# Altium PCB PCB_HOPE.PcbDoc (part 2 of 2)
Units mm, origin at the board's own origin, x right, y up, seen from the top; angles counter-clockwise.
Board outline 70 x 50 mm, 4 copper layers (Top Layer, Layer 1, Layer 2, Bottom Layer), stack 1.572 mm thick; 98 components, 78 nets, 374 pads, 167 vias.
Unrouted connection lines stored in the file: 2.
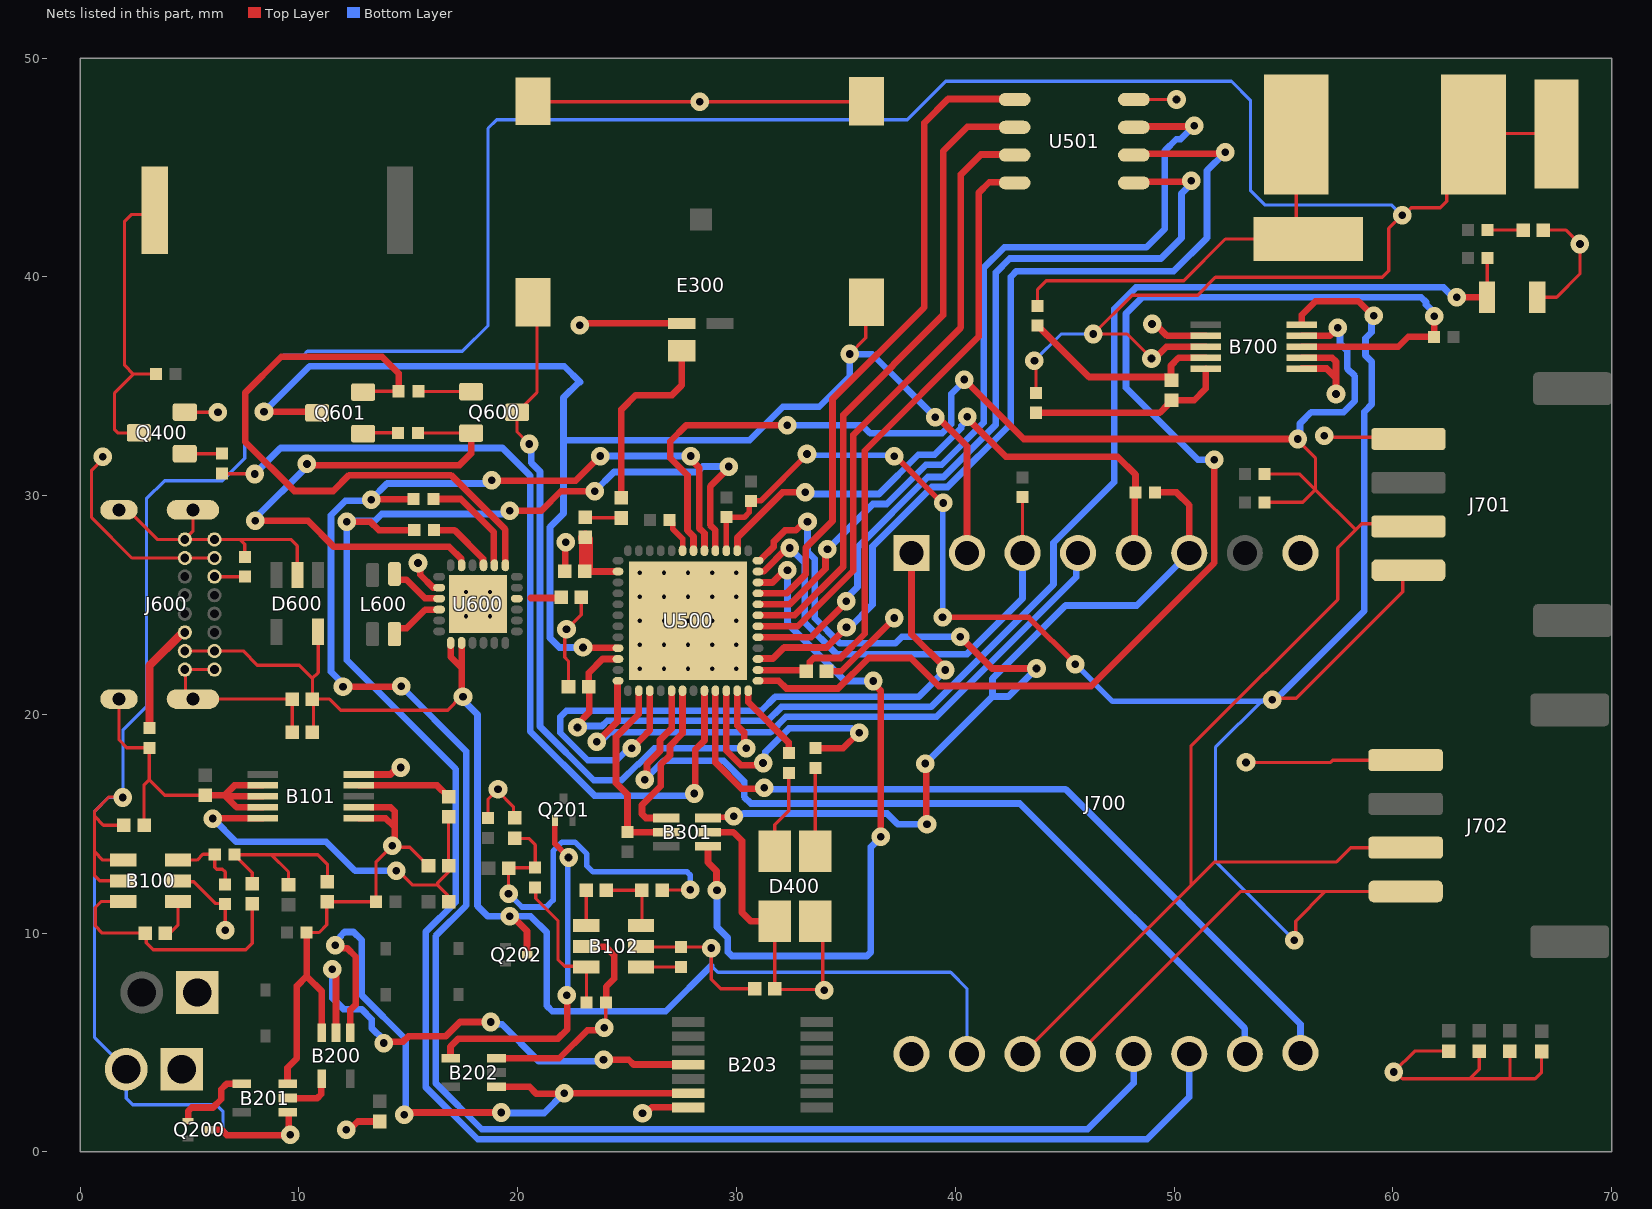
[diagram p4: the nets of this part, all layers, seen from the top]

## Via types
v1: diameter 0.85, hole 0.35, Top Layer to Bottom Layer, 138 vias
v2: diameter 0.5, hole 0.2, Top Layer to Bottom Layer, 29 vias

## Nets (pads, with @x,y where several pads share a name; then routed paths per layer and width w, separated by ;. In a path a pad name is that pad's centre, name@x,y a point inside that pad or via, vN(x,y) a via of type N, cw(c..) or ccw(c..) an arc to the next point about the centre after c; other vN are vias at no path point) (continued)
GND: B100.2 B101.2 B101.3 B101.4 B101.6 B101.7 B101.10 B102.2 B200.3 B201.3 B202.3 B203.7 B300.2 B301.2 B700.1 B700.2 B700.7 C100.2 C101.2 C102.2 C106.2 C107.2 C110.2 C111.2 C302.1 C303.2 C304.2 C400.2 C500.2 C501.2 C502.2 C600.2 C601.2 C602.2 C701.2 D400.2 D400.4 D600.2 E300.2 J100.1 J101.1 J600.A1 J600.A12 J600.B1 J600.B12 J600.S1 J600.S2 J600.S3 J600.S4 J700.8 J700.16 J701.4 J702.4 Q400.2 R101.1 R102.1 R103.1 R106.1 R107.1 R600.1 R601.1 SW400.1 SW401.2 U500.49 U501.4 U600.2 U600.25 | length 173.6
  Top Layer w0.15: J600.S2@1.778,20.701 1.778,18.84 2.138,18.48 R601.1@3.168,18.48 ; J600.S1@1.778,29.351 2.178,29.351 3.528,28.001 J600.B12@4.788,28.001 ; C101.2@2.924,14.935 2.924,16.787 3.154,17.017 ; R601.1@3.175,18.473 3.154,18.452 3.154,17.017 ; B100.2@4.476,12.395 4.522,12.349 5.202,12.349 6.195,11.357 6.608,11.357 R101.1@6.629,11.336 ; Q400.2@4.784,33.818 v1@6.299,33.818 ; J600.S3@5.158,29.351 5.158,28.371 J600.B12@4.788,28.001 ; C100.2@5.715,16.304 3.867,16.304 3.154,17.017 ; J600.A12@6.138,22.051 J600.B1@4.788,22.051 4.815,22.024 4.815,20.882 4.996,20.701 J600.S4@5.158,20.701 C601.2@9.7,20.701 C600.2@9.7,19.177 ; v1(6.629,10.135) R101.1@6.629,11.328 ; R600.1@7.544,27.196 7.523,27.217 7.523,27.778 7.3,28.001 ; D600.2@9.931,26.37 9.931,27.703 9.634,28.001 7.3,28.001 ; R103.1@10.356,10.033 10.922,10.033 11.278,10.389 C106.2@11.278,11.405 ; C106.2@11.307,11.434 R102.1@13.516,11.434 ; R102.1@13.52,11.438 13.52,13.241 v1(14.275,13.995) 14.34,13.93 15.074,13.93 C102.2@15.923,13.081 ; R107.1@18.644,15.258 18.644,16.129 v1(19.101,16.586) 19.101,16.494 19.807,15.788 19.807,15.324 C111.2@19.863,15.268 ; SW401.2@20.701,48.029 20.724,48.006 v1(28.321,48.006) 35.918,48.006 SW400.1@35.941,48.029 ; v1(22.234,23.901) 22.234,23.809 22.158,23.733 22.158,22.607 22.324,22.442 22.324,21.316 22.352,21.288 C303.2@22.352,21.232 ; v1@22.264,23.901 22.264,23.912 22.904,24.552 22.904,25.34 C602.2@22.914,25.349 ; v1(23.952,5.671) 23.952,5.764 24.026,5.837 24.026,6.812 R106.1@24.047,6.833 ; D400.4@31.753,10.538 31.753,7.486 31.809,7.43 33.972,7.43 v1(34.011,7.391) ; D400.2@33.744,10.397 33.945,10.196 33.945,7.478 v1@33.934,7.468 ; U501.4@48.166,48.108 v1(50.114,48.108) ; v1(53.289,17.805) 57.157,17.805 57.26,17.908 J702.4@60.492,17.908 ; J700.8@55.766,27.368 J700.8@55.778,27.381 ; v1(56.871,32.731) 56.936,32.666 60.641,32.666 J701.4@60.716,32.591 ; C304.2@62.56,4.614 61.002,4.614 v1(60.046,3.658) 60.138,3.658 60.443,3.353 63.525,3.353 ; C500.2@63.957,4.614 63.957,3.785 63.525,3.353 ; C501.2@65.354,4.614 65.354,3.353 ; B300.2@66.606,39.065 67.488,39.065 68.555,40.132 v1(68.555,41.504) 67.92,42.139 C400.2@66.881,42.139 ; C701.2@66.802,4.595 66.802,3.65 66.504,3.353 65.354,3.353 ; J600.B12@4.788,28.001 J600.A1@6.138,28.001 7.3,28.001 ; 63.525,3.353 65.354,3.353
  Top Layer w0.305: C100.2@5.715,16.304 6.607,16.304 ; B101.4@8.341,15.756 7.155,15.756 6.655,16.256 ; B101.3@8.341,16.256 6.655,16.256 ; B101.2@8.341,16.756 7.059,16.756 6.607,16.304 ; 9.474,3.852 9.906,4.283 9.906,7.584 10.356,8.034 ; B201.3@9.483,3.114 9.483,3.852 ; R103.1@10.356,10.033 10.356,8.034 ; B200.3@11.049,5.453 11.049,7.341 10.356,8.034 ; C106.2@11.278,11.405 C106.2@11.303,11.43 ; v1(12.167,1.016) 12.314,1.016 12.692,1.394 C110.2@13.691,1.394 ; B101.6@12.741,15.256 13.964,15.256 14.38,14.84 ; B101.10@12.741,17.256 14.187,17.256 14.508,17.577 v1(14.656,17.577) ; B101.7@13.289,15.754 14.201,15.754 14.38,15.575 14.38,14.84 ; v1(14.275,13.995) 14.379,14.1 14.379,14.84 ; v1(15.443,26.924) 15.548,26.82 15.548,26.383 16.128,25.803 16.403,25.803 U600.2@16.411,25.794 ; B202.3@19.033,4.282 21.902,4.282 23.186,5.567 23.848,5.567 v1(23.952,5.671) ; C302.1@22.146,26.543 22.174,26.571 22.174,27.835 v1(22.203,27.864) ; v1(22.835,37.795) 22.913,37.874 E300.2@27.497,37.874 ; B102.2@23.134,9.398 23.144,9.388 24.013,9.388 24.409,8.992 24.409,7.921 24.047,7.558 R106.1@24.047,6.833 ; v1(25.705,1.765) 25.852,1.765 26.126,2.038 B203.7@27.796,2.038 ; B301.2@28.697,14.62 28.703,14.614 29.861,14.614 30.251,14.224 30.251,10.947 30.658,10.541 D400.4@31.75,10.541 D400.4@31.753,10.538 ; C107.2@31.753,7.468 C107.2@31.791,7.43 ; D400.2@33.6,10.541 D400.2@33.744,10.397 ; C502.2@34.115,21.971 34.793,21.971 37.211,24.389 v1(37.211,24.409) ; v1(48.997,37.846) 49.144,37.846 49.686,37.305 B700.7@51.445,37.305 ; B700.1@55.845,35.814 56.976,35.814 57.404,35.386 ; B700.2@55.845,36.305 57.222,36.305 57.4,36.126 ; v1(57.404,34.646) 57.404,35.386 ; 57.404,36.126 57.404,35.386 ; 6.607,16.304 6.655,16.256
  Top Layer w0.381: R102.1@13.516,11.434 R102.1@13.52,11.438
  other v1: 6.299,33.807
  other v2: 25.588,22.082 26.688,22.082 27.788,22.082 28.888,22.082 29.988,22.082 25.588,23.182 26.688,23.182 27.788,23.182 28.888,23.182 29.988,23.182 25.588,24.282 26.688,24.282 27.788,24.282 28.888,24.282 29.988,24.282 17.636,24.494 18.736,24.494 25.588,25.382 26.688,25.382 27.788,25.382 28.888,25.382 29.988,25.382 17.636,25.594 18.736,25.594 25.588,26.482 26.688,26.482 27.788,26.482 28.888,26.482 29.988,26.482
HT: B100.4 B100.5 B201.1 B700.8 C101.1 J100.2 P700.1 Q200.3 R700.2 X700.2 | length 166.8
  Top Layer w0.15: v1@1.93,16.231 1.321,16.231 0.66,15.57 0.66,15.342 ; B100.5@1.976,12.395 0.889,12.395 0.66,12.624 0.66,13.716 ; B100.4@1.976,13.345 1.031,13.345 0.66,13.716 ; C101.1@2.004,14.935 1.067,14.935 0.66,15.342 ; 6.477,1.016 6.502,0.991 ; v1@43.644,36.193 43.644,36.054 43.688,36.01 R700.2@43.688,34.689 ; v1@43.723,36.144 v1@43.723,36.171 ; v1(48.971,36.271) 47.854,37.389 v1(46.304,37.389) 48.082,39.167 51.079,39.167 51.892,39.98 59.519,39.98 59.817,40.277 59.817,42.215 v1(60.427,42.824) 60.519,42.824 60.849,43.155 62.171,43.155 62.468,43.452 62.468,45.286 63.74,46.558 P700.1@67.488,46.558 ; 0.66,13.716 0.66,15.342
  Top Layer w0.305: Q200.3@5.936,1.016 6.477,1.016 ; 6.502,0.991 6.592,0.879 6.706,0.765 6.83,0.765 9.578,0.765 v1(9.601,0.787) 9.542,0.847 9.542,1.766 9.494,1.814 B201.1@9.483,1.814 ; v1(48.971,36.271) 49.119,36.271 49.652,36.805 B700.8@51.445,36.805
  Bottom Layer w0.15: v1(9.601,0.787) 9.576,0.762 6.825,0.762 6.528,1.06 6.528,1.861 6.23,2.159 2.406,2.159 2.108,2.457 J100.2@2.108,3.785 0.66,5.232 0.66,15.57 1.294,16.204 1.955,16.204 v1(1.956,16.205) 1.956,19.271 3.032,20.347 3.032,29.854 3.861,30.683 6.498,30.683 7.529,31.714 7.529,34.656 9.296,36.424 10.211,36.424 10.389,36.601 17.475,36.601 18.644,37.77 18.644,46.787 19.034,47.177 37.804,47.177 39.564,48.937 52.629,48.937 53.492,48.073 53.492,43.96 54.171,43.282 59.958,43.282 60.415,42.824 v1(60.427,42.824) ; v1(43.621,36.17) 44.84,37.389 v1(46.304,37.389)
NetB1_3: B700.3 R703.1 U500.25 | length 60
  Top Layer w0.305: U500.25@30.988,21.532 31.935,21.532 32.283,21.184 34.649,21.184 36.046,22.581 37.97,22.581 39.247,21.304 46.215,21.304 51.841,26.93 v1(51.841,31.648) ; B700.3@55.845,36.805 60.249,36.805 60.706,37.262 R703.1@61.882,37.262 61.891,37.271 61.891,38.192 v1(61.9,38.202)
  Bottom Layer w0.305: v1(51.841,31.648) 51.085,31.648 47.803,34.931 47.803,38.329 48.539,39.065 61.3,39.065 61.516,38.85 61.516,38.733 61.9,38.349 v1(61.9,38.202)
NetB1_4: B700.4 J700.14 J701.2 J702.2 R702.2 R706.2 U500.42 | length 100.5
  Top Layer w0.15: J700.14@43.078,4.481 50.775,12.177 ; R706.2@54.146,29.693 55.88,29.693 56.464,30.277 ; R702.2@54.146,30.988 55.753,30.988 56.464,30.277 ; v1(55.651,32.588) 55.651,32.535 56.464,31.722 56.464,30.277 ; J702.2@60.589,13.91 58.08,13.91 57.429,13.259 51.856,13.259 50.775,12.177 ; J701.2@60.716,28.591 60.595,28.712 58.58,28.712 58.304,28.437 ; 50.775,12.177 50.775,18.546 57.48,25.252 57.48,27.612 58.304,28.437 ; 56.464,30.277 58.304,28.437
  Top Layer w0.305: U500.42@28.038,27.482 28.038,28.137 27.762,28.412 27.762,30.934 26.975,31.721 26.975,32.486 27.712,33.223 32.309,33.223 v1(32.315,33.217) ; v1(40.411,35.306) 43.129,32.588 v1(55.651,32.588) ; B700.4@55.845,37.305 57.121,37.305 v1(57.485,37.668)
  Bottom Layer w0.305: v1(32.315,33.217) 35.745,33.217 36.11,32.851 39.392,32.851 39.818,33.278 39.818,34.652 40.411,35.245 v1(40.411,35.306) ; v1(55.651,32.588) 55.756,32.693 55.756,33.302 56.268,33.814 57.745,33.814 58.268,34.337 58.268,35.462 57.912,35.818 57.912,36.634 57.589,36.956 57.589,37.564 v1(57.485,37.668)
NetB1_5: B700.5 J700.13 J701.1 J702.1 R701.2 R707.2 U500.39 | length 103.3
  Top Layer w0.15: J700.13@45.618,4.481 53.047,11.91 56.92,11.91 ; v1(54.483,20.676) 54.548,20.741 55.59,20.741 60.45,25.601 60.45,26.345 60.47,26.345 J701.1@60.716,26.591 ; v1(55.499,9.677) 55.564,9.743 55.564,10.555 56.92,11.91 ; J702.1@60.589,11.91 56.92,11.91
  Top Layer w0.254: U500.39@29.538,27.482 U500.39@29.538,27.482 29.539,29.013 R707.2@29.54,29.014 30.36,29.014 30.59,29.243 30.59,29.682 R701.2@30.658,29.751 30.675,29.768 31.116,29.768 33.223,31.875 v1(33.223,31.902) ; v1(37.211,31.801) 37.262,31.801 39.395,29.667 v1(39.446,29.667) ; v1(39.421,24.435) 43.358,24.435 v1(45.491,22.301)
  Top Layer w0.305: B700.5@55.845,37.805 55.845,38.268 56.464,38.887 58.426,38.887 59.086,38.227 v1(59.131,38.227)
  Bottom Layer w0.15: 54,20.599 v1@54.077,20.676 ; v1@54.559,20.599 v1(54.483,20.676) v1@54.077,20.676 ; v1(55.499,9.677) 51.892,13.284 51.892,18.491 v1@54.077,20.676
  Bottom Layer w0.254: v1(33.223,31.902) 33.274,31.852 37.16,31.852 v1(37.211,31.801) ; v1(39.421,24.435) 39.436,24.45 39.436,29.657 v1(39.446,29.667) ; v1(45.491,22.301) 47.193,20.599 54,20.599
  Bottom Layer w0.305: v1@54.559,20.599 58.699,24.74 58.699,33.838 59.043,34.182 59.043,36.113 58.75,36.406 58.75,37.192 59.027,37.469 59.027,38.123 v1(59.131,38.227)
NetB1_9: B700.9 C700.2 R704.1 | length 9.4
  Top Layer w0.305: R704.1@43.764,37.777 46.121,35.42 48.476,35.42 49.749,35.42 C700.2@49.886,35.283 ; C700.2@49.86,35.42 49.86,35.953 50.212,36.305 B700.9@51.445,36.305
NetB1_10: B700.10 C700.1 R700.1 | length 9.2
  Top Layer w0.305: R700.1@43.688,33.789 49.353,33.789 49.728,34.164 49.728,34.206 49.848,34.326 C700.1@49.962,34.326 ; C700.1@49.886,34.363 50.924,34.363 51.445,34.884 B700.10@51.445,35.805
NetB2_1: B300.1 C303.1 R300.2 U500.10 | length 62
  Top Layer w0.15: B300.1@64.318,39.078 R300.2@64.318,40.856
  Top Layer w0.305: v1(22.733,19.406) 22.733,19.553 23.268,20.088 23.268,21.236 C303.1@23.244,21.26 ; C303.1@23.246,21.262 23.246,21.9 23.879,22.532 U500.10@24.588,22.532 ; v1(62.924,39.065) B300.1@64.306,39.065 ; R300.2@64.318,40.856 R300.2@64.331,40.869
  Bottom Layer w0.305: v1(22.733,19.406) 22.8,19.473 23.854,19.473 24.094,19.713 31.422,19.713 32.057,20.348 38.893,20.348 44.491,25.946 44.491,27.848 47.269,30.627 47.269,38.532 48.258,39.52 62.322,39.52 62.777,39.065 v1(62.924,39.065)
NetB3_1: B301.1 U500.34 | length 33.6
  Top Layer w0.305: B301.1@28.697,13.97 28.697,13.238 29.09,12.846 29.09,11.982 v1(29.108,11.963) ; U500.34@30.988,26.032 31.648,26.032 32.213,26.597 v1(32.331,26.597) ; v1(36.246,21.53) 36.246,21.434 36.601,21.079 v1(36.601,14.402)
  Bottom Layer w0.305: v1(29.108,11.963) 29.108,10.287 29.61,9.785 29.61,9.134 29.789,8.955 35.966,8.955 36.144,9.134 36.144,13.945 v1(36.601,14.402) ; v1(32.331,26.597) 32.331,24.159 34.96,21.53 v1(36.246,21.53)
NetB3_3: B301.3 J700.6 R302.2 U500.36 | length 55.2
  Top Layer w0.254: B301.3@28.697,15.27 28.733,15.306 29.835,15.306 v1(29.87,15.342)
  Top Layer w0.305: U500.36@30.988,27.032 31.063,27.032 31.708,27.678 31.708,27.91 32.214,28.415 32.713,28.415 33.101,28.804 v1(33.249,28.804) ; v1(38.633,17.755) 38.672,17.716 38.672,15.024 v1(38.71,14.986) ; v1(40.234,23.546) 41.681,22.098 v1(43.713,22.098) ; R302.2@49.142,30.15 50.114,30.15 50.698,29.566 J700.6@50.698,27.381
  Bottom Layer w0.305: v1(29.87,15.342) 29.975,15.446 30.299,15.446 30.322,15.469 36.887,15.469 37.369,14.986 v1(38.71,14.986) ; v1(33.249,28.804) 33.249,27.436 33.576,27.109 33.576,24.404 34.73,23.25 37.26,23.25 37.556,23.546 v1(40.234,23.546) ; v1(38.633,17.755) 41.701,20.822 ; v1(43.713,22.098) 42.438,20.822 41.701,20.822 ; J700.6@50.698,27.381 48.296,24.979 45.045,24.979 41.701,21.635 41.701,20.822
NetB3_4: B301.4 U500.18 | length 7.6
  Top Layer w0.305: B301.4@26.797,15.27 25.858,15.27 25.679,15.449 25.679,15.862 26.534,16.717 26.534,17.699 26.963,18.129 26.963,18.564 27.538,19.139 U500.18@27.538,21.082
NetB3_5: B301.5 R301.1 U500.14 | length 8.9
  Top Layer w0.254: B301.5@26.795,14.622 B301.5@26.797,14.62
  Top Layer w0.305: R301.1@25.019,14.623 25.019,16.336 24.495,16.86 24.495,18.975 25.538,20.018 U500.14@25.538,21.082 ; R301.1@25.021,14.622 B301.5@26.795,14.622
NetB4_1: B100.1 C103.1 | length 1.8
  Top Layer w0.15: C103.1@3.889,10.008 4.092,10.008 4.476,10.391 B100.1@4.476,11.445
NetB4_3: B100.3 R100.2 R101.2 | length 3.5
  Top Layer w0.15: B100.3@4.476,13.345 5.344,13.345 5.613,13.614 6.129,13.614 R100.2@6.154,13.589 6.154,13.016 6.242,12.929 6.502,12.929 6.629,12.802 R101.2@6.629,12.236
NetB4_6: B100.6 C103.2 L101.1 | length 12
  Top Layer w0.15: B100.6@1.976,11.445 0.955,11.445 0.686,11.176 0.686,10.338 1.016,10.008 C103.2@2.969,10.008 3.025,9.952 3.025,9.569 3.348,9.246 7.576,9.246 7.874,9.543 L101.1@7.874,11.351
NetB5_5: B101.5 C102.1 C104.1 L100.2 | length 18.1
  Top Layer w0.15: v1(14.453,12.852) 14.545,12.852 15.196,12.202 16.351,12.202 ; L100.2@16.84,15.316 16.842,15.315 C102.1@16.842,13.082 ; C104.1@16.843,11.438 16.787,11.494 16.787,11.765 16.351,12.202 ; C102.1@16.843,13.081 C102.1@16.842,13.082 ; 16.351,12.202 16.351,12.317 16.842,12.808 C102.1@16.842,13.082
  Top Layer w0.305: v1(6.071,15.24) 6.084,15.254 8.339,15.254 B101.5@8.341,15.256
  Bottom Layer w0.305: v1(6.071,15.24) 7.137,14.173 11.252,14.173 12.573,12.852 v1(14.453,12.852)
NetB5_9: B101.9 L100.1 | length 4.3
  Top Layer w0.305: B101.9@12.741,16.756 16.32,16.756 L100.1@16.84,16.236
NetB6_1: B102.1 C108.1 | length 1.6
  Top Layer w0.15: B102.1@23.137,10.351 C108.1@23.137,11.963
  Top Layer w0.305: B102.1@23.134,10.348 B102.1@23.137,10.351
NetB6_3: B102.3 R105.2 R106.2 | length 6.8
  Top Layer w0.15: R105.2@20.803,12.098 20.824,12.077 20.824,11.587 21.844,10.566 21.844,8.792 22.142,8.494 23.088,8.494 B102.3@23.134,8.448 ; R106.2@23.147,6.833 B102.3@23.147,8.435
NetB6_4: B102.4 R104.2 | length 1.8
  Top Layer w0.15: B102.4@25.643,8.457 R104.2@27.449,8.457
  Top Layer w0.305: B102.4@25.634,8.448 B102.4@25.643,8.457 ; R104.2@27.449,8.457 R104.2@27.457,8.465
NetB6_6: B102.6 C108.2 L102.1 | length 3.3
  Top Layer w0.15: C108.2@24.057,11.963 L102.1@25.679,11.963 B102.6@25.679,10.393
  Top Layer w0.305: B102.6@25.634,10.348 B102.6@25.679,10.393
NetB7_4: B200.4 B201.2 | length 2.3
  Top Layer w0.305: B201.2@9.483,2.464 10.843,2.464 11.021,2.642 11.021,3.325 B200.4@11.049,3.353
NetB8_4: B201.4 Q200.1 | length 3.7
  Top Layer w0.305: Q200.1@4.936,1.416 4.936,1.862 5.105,2.032 6.071,2.032 6.452,2.413 6.452,2.87 6.695,3.114 B201.4@7.383,3.114
NetB9_4: B202.4 Q201.1 | length 16
  Top Layer w0.254: Q201.1@21.698,15.146 21.698,14.091 v1(22.327,13.462)
  Top Layer w0.305: B202.4@16.933,4.282 16.933,4.817 17.297,5.182 21.844,5.182 22.273,5.611 22.273,7.14 v1(22.25,7.163)
  Bottom Layer w0.254: v1(22.25,7.163) 22.288,7.201 22.288,13.424 v1(22.327,13.462)
NetC4_1: C300.1 C301.1 | length 1.7
  Top Layer w0.15: C300.1@23.089,29.01 23.104,28.994 24.724,28.994 C301.1@24.74,28.979
NetC4_2: C300.2 C302.2 U500.2 | length 3.1
  Top Layer w0.305: C302.2@23.066,26.532 U500.2@24.588,26.532
  Top Layer w0.624: C302.2@23.066,26.568 23.121,26.623 23.121,28.012 23.066,28.067 C300.2@23.089,28.09
NetC5_2: C301.2 E300.3 | length 8.8
  Top Layer w0.305: C301.2@24.74,29.899 24.74,33.934 25.4,34.595 27.051,34.595 27.497,35.041 E300.3@27.497,36.624
NetC14_1: C105.1 C106.1 L101.2 R100.1 | length 8.5
  Top Layer w0.15: L101.2@7.874,12.271 7.874,12.769 R100.1@7.054,13.589 8.687,13.589 ; C105.1@9.525,12.223 9.525,12.802 8.738,13.589 10.871,13.589 11.303,13.157 C106.1@11.303,12.35
NetC18_1: C109.1 C111.1 L102.2 R105.1 | length 18.5
  Top Layer w0.15: v1(19.583,11.811) 19.585,11.812 C109.1@19.585,12.978 ; C109.1@19.595,12.989 R105.1@20.794,12.989 ; C111.1@19.863,14.348 19.879,14.332 20.505,14.332 20.803,14.035 R105.1@20.803,12.998 ; L102.2@26.599,11.963 26.612,11.976 27.877,11.976 v1(27.889,11.989)
  Top Layer w0.254: C109.1@19.585,12.978 C109.1@19.586,12.979 C109.1@19.595,12.989 ; R105.1@20.794,12.989 R105.1@20.803,12.998
  Bottom Layer w0.254: v1(19.583,11.811) 19.586,11.811 20.198,11.199 21.308,11.199 21.625,11.515 21.625,13.753 22.036,14.164 22.617,14.164 23.165,13.617 23.165,13.081 23.444,12.802 27.74,12.802 27.889,12.653 v1(27.889,11.989)
NetC21_1: C400.1 R400.1 | length 1.6
  Top Layer w0.15: R400.1@64.331,42.139 C400.1@65.961,42.139
NetC24_1: C502.1 U500.26 U501.8 | length 29.9
  Top Layer w0.305: U500.26@30.988,22.032 30.993,22.027 33.19,22.027 33.195,22.022 33.246,22.022 33.353,22.129 33.353,22.402 33.534,22.583 34.763,22.583 35.865,23.686 35.865,32.055 41.072,37.262 41.072,43.84 41.554,44.323 U501.8@42.716,44.323
NetC27_1: C602.1 U600.16 | length 1.4
  Top Layer w0.305: 20.593,25.316 20.602,25.324 21.969,25.324 C602.1@21.994,25.349
NetD1_1: D400.1 R403.2 | length 3.8
  Top Layer w0.15: D400.1@33.6,13.741 R403.2@33.6,17.559
NetD1_3: D400.3 R404.2 | length 3.9
  Top Layer w0.15: D400.3@31.75,13.741 31.75,14.961 32.385,15.596 R404.2@32.385,17.33
NetJ1_A5: J600.A5 R600.2 | length 1.4
  Top Layer w0.15: J600.A5@6.14,26.299 R600.2@7.541,26.299
  Top Layer w0.303: J600.A5@6.138,26.301 J600.A5@6.14,26.299 ; R600.2@7.541,26.299 R600.2@7.544,26.296
NetJ1_B5: J600.B5 R601.2 | length 5.1
  Top Layer w0.381: R601.2@3.175,19.373 3.175,22.229 4.645,23.7 4.737,23.7 J600.B5@4.788,23.751
NetJ2_1: J700.1 U500.15 | length 32.2
  Top Layer w0.305: v1(25.222,18.452) 25.862,19.092 25.862,19.098 26.038,19.274 U500.15@26.038,21.082 ; J700.1@37.998,27.381 37.998,23.666 39.548,22.116 v1(39.548,22.031)
  Bottom Layer w0.305: v1(25.222,18.452) 25.075,18.452 24.529,17.907 23.203,17.907 21.946,19.164 21.946,19.888 22.225,20.168 31.132,20.168 31.767,20.803 38.319,20.803 v1(39.548,22.031)
NetJ2_2: J700.2 Q601.3 SW400.2 U500.9 | length 63.6
  Top Layer w0.15: v1(35.179,36.474) 35.916,37.211 SW400.2@35.916,38.814
  Top Layer w0.305: v1(8.407,33.833) Q601.3@10.837,33.833 ; v1(22.987,23.063) 23.009,23.041 24.579,23.041 U500.9@24.588,23.032 ; SW400.2@35.916,38.814 SW400.2@35.941,38.839 ; v1(39.091,33.579) 39.218,33.579 40.538,32.258 J700.2@40.538,27.381
  Bottom Layer w0.305: v1(8.407,33.833) 10.49,35.916 22.131,35.916 22.868,35.179 ; 22.791,35.179 22.098,34.486 22.098,32.537 ; v1(22.987,23.063) 21.908,23.063 21.475,23.495 21.475,28.562 22.098,29.185 22.098,32.537 ; v1(39.091,33.579) 36.209,36.461 35.193,36.461 v1(35.179,36.474) 35.179,35.458 33.782,34.061 32.131,34.061 30.607,32.537 22.098,32.537
NetJ2_3: J700.3 R705.1 U500.35 | length 21.8
  Top Layer w0.15: J700.3@43.078,27.381 R705.1@43.078,29.928
  Top Layer w0.305: U500.35@30.988,26.532 30.996,26.541 31.246,26.541 32.314,27.608 v1(32.436,27.608)
  Bottom Layer w0.305: v1(32.436,27.608) 32.436,27.606 33.122,26.92 33.122,24.206 34.569,22.758 40.538,22.758 43.078,25.298 J700.3@43.078,27.381
NetJ2_4: J700.4 U500.12 | length 29.4
  Top Layer w0.305: v1(23.622,18.745) 24.56,19.683 24.56,21.512 24.581,21.532 U500.12@24.588,21.532
  Bottom Layer w0.305: v1(23.622,18.745) 23.77,18.745 24.204,19.18 31.55,19.18 32.263,19.893 39.146,19.893 45.531,26.278 45.531,27.294 J700.4@45.618,27.381
NetJ2_5: J700.5 R302.1 U500.38 | length 26
  Top Layer w0.305: U500.38@30.038,27.482 30.046,27.491 30.046,28.09 32.106,30.15 v1(33.147,30.15) ; v1(40.545,33.604) 40.545,33.546 42.316,31.775 47.422,31.775 48.238,30.959 48.238,30.153 R302.1@48.242,30.15 48.2,30.108 48.2,27.423 J700.5@48.158,27.381
  Bottom Layer w0.305: v1(33.147,30.15) 33.223,30.074 36.512,30.074 38.307,31.868 39.052,31.868 40.273,33.089 40.273,33.184 40.545,33.457 v1(40.545,33.604)
NetJ2_9: J700.9 U500.21 | length 36.3
  Top Layer w0.305: U500.21@29.038,21.082 29.038,17.795 30.232,16.6 31.214,16.6 v1(31.267,16.653)
  Bottom Layer w0.305: v1(31.267,16.653) 31.334,16.586 45.034,16.586 55.778,5.842 J700.9@55.778,4.521
NetJ2_10: J700.10 U500.17 | length 39
  Top Layer w0.305: v1(25.806,17.018) 25.911,17.122 25.911,17.729 26.508,18.327 26.508,18.828 27.038,19.358 U500.17@27.038,21.082
  Bottom Layer w0.305: v1(25.806,17.018) 26.67,17.882 29.413,17.882 30.353,16.942 30.353,16.231 30.658,15.926 42.951,15.926 53.238,5.639 J700.10@53.238,4.481
NetJ2_11: J700.11 R603.1 U500.40 | length 93.2
  Top Layer w0.303: v1(12.192,28.804) 13.28,28.804 13.661,28.423 R603.1@15.273,28.423 ; v1(19.634,29.312) 21.082,29.312 21.971,30.201 v1(23.52,30.201) ; U500.40@29.038,27.482 29.038,28.42 28.795,28.662 28.795,30.414 29.643,31.263 v1(29.643,31.33)
  Bottom Layer w0.303: v1(12.192,28.804) 12.239,28.85 13.477,28.85 13.786,29.159 19.334,29.159 19.486,29.312 v1(19.634,29.312) ; v1(23.52,30.201) 24.403,31.083 28.216,31.083 28.462,31.33 v1(29.643,31.33)
  Bottom Layer w0.305: v1(12.192,28.804) 12.192,22.478 17.17,17.5 17.17,11.43 15.794,10.054 15.794,2.964 18.174,0.584 48.768,0.584 50.698,2.515 J700.11@50.698,4.481
NetJ2_12: J700.12 R604.1 U500.41 | length 89.8
  Top Layer w0.303: v1(12.014,21.26) 12.027,21.273 14.668,21.273 v1(14.681,21.285) ; v1(13.31,29.82) 13.322,29.832 15.235,29.832 R604.1@15.247,29.845 ; v1(18.821,30.709) 18.847,30.683 22.648,30.683 v1(23.774,31.81) ; v1(27.915,31.81) 27.915,31.662 28.296,31.281 28.296,28.521 28.538,28.279 U500.41@28.538,27.482
  Bottom Layer w0.303: v1(12.014,21.26) 12.014,21.406 11.465,21.955 11.465,29.105 12.125,29.764 13.254,29.764 v1(13.31,29.82) 13.31,29.835 14.031,30.556 18.521,30.556 18.673,30.709 v1(18.821,30.709) ; v1(14.681,21.285) 17.653,18.313 17.653,11.271 16.248,9.866 16.248,3.152 18.362,1.038 46.047,1.038 48.158,3.15 J700.12@48.158,4.481 ; v1(23.774,31.81) v1(27.915,31.81)
NetLS1_N: LS400.N Q400.3 R401.1 | length 13.8
  Top Layer w0.15: Q400.3@2.684,32.868 1.724,32.868 1.575,33.016 1.575,34.696 2.438,35.56 ; LS400.N@3.214,42.85 2.33,42.85 2.032,42.552 2.032,35.966 2.438,35.56 ; R401.1@3.462,35.56 2.438,35.56
  Top Layer w0.254: LS400.N@3.214,42.85 LS400.N@3.417,43.053
NetP701_1: P701.1 R704.2 X700.1 | length 19.1
  Top Layer w0.15: R704.2@43.764,38.677 43.764,39.428 44.161,39.825 50.442,39.825 52.349,41.732 P701.1@56.134,41.732 55.589,42.277 X700.1@55.589,46.507
NetQ4_1: Q400.1 R402.2 | length 1.7
  Top Layer w0.15: Q400.1@4.784,31.918 4.785,31.919 6.476,31.919 R402.2@6.477,31.921
NetQ5_1: Q600.1 R602.1 | length 2.4
  Top Layer w0.15: R602.1@15.461,34.757 Q600.1@17.873,34.757
NetQ5_2: Q600.2 R605.2 U600.23 | length 25.1
  Top Layer w0.15: R605.2@15.436,32.868 15.441,32.862 17.868,32.862 Q600.2@17.873,32.857
  Top Layer w0.305: v1(8.001,28.854) 10.414,28.854 11.608,27.661 16.871,27.661 17.428,27.103 17.428,26.828 U600.23@17.436,26.819 ; v1(10.368,31.45) 10.423,31.394 17.348,31.394 17.873,31.919 Q600.2@17.873,32.857
  Bottom Layer w0.305: v1(8.001,28.854) 8.001,28.969 10.368,31.336 v1(10.368,31.45)
NetQ5_3: Q600.3 SW401.1 U500.23 | length 34.1
  Top Layer w0.15: Q600.3@19.973,33.807 19.973,32.91 v1(20.523,32.36) ; Q600.3@20.123,33.807 20.269,33.953 20.269,34.103 20.879,34.713 20.879,38.661 SW401.1@20.701,38.839
  Top Layer w0.305: U500.23@30.038,21.082 30.038,19.487 30.35,19.175 30.35,18.557 v1(30.455,18.452)
  Bottom Layer w0.303: v1(20.523,32.36) 20.628,32.255 20.628,31.499 21.022,31.105 21.022,19.446 23.475,16.993 24.754,16.993 25.487,17.726 25.523,17.726 26.25,18.452 v1(30.455,18.452)
NetQ6_1: Q601.1 R605.1 | length 1.6
  Top Layer w0.15: Q601.1@12.937,32.87 14.534,32.87 R605.1@14.536,32.868
NetQ6_2: Q601.2 R602.2 U600.19 | length 28.5
  Top Layer w0.15: Q601.2@12.937,34.773 R602.2@14.561,34.773
  Top Layer w0.303: R602.2@14.561,34.773 14.561,35.586 13.8,36.347 9.195,36.347 7.544,34.696 7.544,32.461 9.794,30.211 11.567,30.211 12.297,30.94 16.946,30.94 19.436,28.45 U600.19@19.436,26.819
NetR20_1: R402.1 U500.20 | length 40.4
  Top Layer w0.15: R402.1@6.493,31.004 v1@7.959,31.004
  Top Layer w0.305: R402.1@6.477,31.021 R402.1@6.493,31.004 ; v1(28.075,16.385) 28.111,16.421 28.111,18.383 28.538,18.809 U500.20@28.538,21.082
  Bottom Layer w0.303: v1(7.976,30.988) 9.164,32.177 19.309,32.177 20.569,30.917 20.569,19.233 23.51,16.291 27.982,16.291 v1(28.075,16.385)
NetR21_1: R403.1 U500.22 | length 12.4
  Top Layer w0.305: U500.22@29.538,21.082 29.538,18.34 30.197,17.681 31.118,17.681 v1(31.217,17.78) ; R403.1@33.604,18.459 34.883,18.459 35.59,19.166 v1(35.611,19.166)
  Bottom Layer w0.305: v1(31.217,17.78) 31.321,17.884 31.321,18.291 32.394,19.364 35.265,19.364 35.463,19.166 v1(35.611,19.166)
NetR22_1: R404.1 U500.24 | length 3.6
  Top Layer w0.305: U500.24@30.538,21.082 30.538,20.567 32.385,18.72 R404.1@32.385,18.23
NetR26_2: R603.2 U600.21 | length 3.1
  Top Layer w0.15: U600.21@18.417,26.839 U600.21@18.436,26.819
  Top Layer w0.305: R603.2@16.173,28.423 17.109,28.423 18.414,27.117 18.414,26.954 18.428,26.94 18.428,26.849 U600.21@18.417,26.839
NetR27_2: R604.2 U600.20 | length 4.9
  Top Layer w0.305: R604.2@16.147,29.845 17.399,29.845 18.914,28.33 18.914,26.954 18.936,26.932 U600.20@18.936,26.819
NetU1_27: U500.27 U501.2 | length 42.5
  Top Layer w0.305: U500.27@30.988,22.532 31.075,22.532 31.097,22.555 31.674,22.555 32.182,23.063 34.117,23.063 v1(35.031,23.978) ; U501.2@48.166,45.568 48.222,45.624 52.279,45.624 v1(52.349,45.695)
  Bottom Layer w0.305: v1(35.031,23.978) 35.179,23.978 36.22,25.019 36.22,27.681 38.934,30.395 39.651,30.395 42.545,33.289 42.545,40.005 42.801,40.261 49.99,40.261 51.511,41.783 51.511,44.856 v1(52.349,45.695)
NetU1_29: U500.29 U501.1 | length 37.6
  Top Layer w0.305: U500.29@30.988,23.532 33.418,23.532 35.027,25.141 v1(35.027,25.171) ; U501.1@48.166,44.298 48.216,44.348 50.733,44.348 v1(50.784,44.399)
  Bottom Layer w0.305: v1(35.027,25.171) 35.027,25.319 35.535,25.827 35.535,27.638 38.746,30.849 39.462,30.849 41.859,33.246 41.859,40.208 42.494,40.843 49.403,40.843 50.34,41.78 50.34,43.808 50.784,44.252 v1(50.784,44.399)
NetU1_30: U500.30 U501.7 | length 28.4
  Top Layer w0.305: U500.30@30.988,24.032 32.804,24.032 35.342,26.571 35.342,32.777 40.259,37.694 40.259,44.679 41.173,45.593 U501.7@42.716,45.593
NetU1_31: U500.31 U501.6 | length 29.4
  Top Layer w0.305: U500.31@30.988,24.532 32.66,24.532 34.887,26.759 34.887,33.693 39.446,38.252 39.446,45.745 40.564,46.863 U501.6@42.716,46.863
NetU1_32: U500.32 U501.3 | length 38.5
  Top Layer w0.305: U500.32@30.988,25.032 32.43,25.032 32.52,25.123 32.529,25.123 34.067,26.661 34.067,27.45 v1(34.16,27.543) ; U501.3@48.166,46.85 48.191,46.876 50.889,46.876 v1(50.927,46.914)
  Bottom Layer w0.305: v1(34.16,27.543) 36.235,29.619 36.872,29.619 38.667,31.414 39.383,31.414 41.3,33.331 41.3,40.411 42.24,41.351 48.734,41.351 49.581,42.198 49.581,45.771 50.1,46.29 50.303,46.29 v1(50.927,46.914)
NetU1_33: U500.33 U501.5 | length 30
  Top Layer w0.305: U500.33@30.988,25.532 32.286,25.532 32.331,25.577 32.34,25.577 33.163,26.4 33.163,27.613 34.392,28.842 34.392,34.417 38.583,38.608 38.583,47.041 39.675,48.133 U501.5@42.716,48.133
NOT_3V3_BT: B200.2 B203.4 | length 22.9
  Top Layer w0.203: B200.2@11.691,5.46 B200.2@11.699,5.453
  Top Layer w0.305: v1(11.532,8.357) 11.532,8.209 11.699,8.042 11.699,5.468 B200.2@11.691,5.46 ; v1(13.882,4.978) 13.947,5.043 14.765,5.043 15.005,5.283 16.705,5.283 17.366,5.944 v1(18.771,5.944) ; v1(23.927,4.216) 25.076,4.216 25.292,4 B203.4@27.711,4
  Bottom Layer w0.305: v1(11.532,8.357) 11.532,7.036 12.04,6.528 12.868,6.528 13.325,6.071 13.325,5.669 13.882,5.111 v1(13.882,4.978) ; v1(18.771,5.944) 18.875,5.839 19.281,5.839 20.978,4.143 23.853,4.143 v1(23.927,4.216)
NOT_3V3_USB: B200.1 B202.1 B203.6 | length 31.9
  Top Layer w0.305: v1(11.659,9.449) 11.806,9.449 11.937,9.318 12.206,9.318 12.598,8.925 12.598,6.744 12.349,6.495 B200.1@12.349,5.453 ; v1(14.813,1.71) 14.907,1.803 v1(19.253,1.803) ; B202.1@19.033,2.982 20.538,2.982 20.863,2.658 22.089,2.658 v1(22.123,2.693) ; v1@22.128,2.688 B203.6@27.796,2.688
  Bottom Layer w0.305: v1(11.659,9.449) 11.659,9.596 11.915,9.853 11.915,9.883 12.091,10.058 12.497,10.058 12.878,9.677 12.878,7.161 14.884,5.155 14.884,1.781 v1(14.813,1.71) ; v1(19.253,1.803) 19.272,1.784 21.215,1.784 v1(22.123,2.693)
USB: B102.5 C107.1 C600.1 C601.1 D600.5 J600.A4 J600.A9 J600.B4 J600.B9 J700.15 Q202.3 R104.1 U600.7 U600.8 | length 81.8
  Top Layer w0.15: v1(1.041,31.775) 1.041,31.683 0.524,31.165 0.524,28.997 2.37,27.151 J600.B9@4.788,27.151 J600.A4@6.138,27.151 ; J600.B4@4.788,22.901 J600.A9@6.138,22.901 7.452,22.901 8.103,22.25 10.02,22.25 10.62,21.651 ; C600.1@10.62,19.177 10.664,19.221 10.664,20.657 C601.1@10.62,20.701 ; D600.5@10.884,23.774 10.884,21.915 10.62,21.651 ; v1(17.501,20.803) 17.408,20.803 16.798,20.193 11.909,20.193 11.401,20.701 C601.1@10.62,20.701 ; B102.5@25.667,9.365 R104.1@27.457,9.365 28.811,9.365 v1(28.854,9.322) 28.854,7.899 29.286,7.468 C107.1@30.833,7.468 ; C601.1@10.62,20.701 10.62,21.651
  Top Layer w0.305: U600.7@16.936,23.269 16.936,22.637 17.45,22.123 ; U600.8@17.445,23.192 17.445,23.149 17.45,23.144 17.45,22.123 ; v1(17.501,20.803) 17.45,20.853 17.45,22.123 ; v1(19.634,10.77) 19.763,10.77 20.43,10.103 20.43,9.026 Q202.3@20.439,9.017 Q202.3@20.447,9.009 ; B102.5@25.634,9.398 B102.5@25.667,9.365
  Bottom Layer w0.15: v1(28.854,9.322) 28.854,8.518 29.152,8.22 39.786,8.22 40.538,7.468 J700.15@40.538,4.481
  Bottom Layer w0.305: v1(17.501,20.803) 17.501,20.66 18.161,20 18.161,11.252 18.644,10.77 v1(19.634,10.77) 20.599,10.77 21.336,10.033 21.336,6.681 21.582,6.435 26.772,6.435 28.854,8.518
USB_D_N: L600.2 U600.4 | length 2.6
  Top Layer w0.303: L600.2@14.368,23.669 14.368,23.793 14.517,23.942 14.925,23.942 15.768,24.785 16.402,24.785 U600.4@16.411,24.794
USB_D_P: L600.1 U600.3 | length 2.6
  Top Layer w0.303: L600.1@14.368,26.419 14.368,26.31 14.517,26.162 14.91,26.162 15.754,25.318 16.275,25.318 16.299,25.294 U600.3@16.411,25.294
VDDA: R500.2 U500.43 | length 1.6
  Top Layer w0.254: R500.2@26.942,28.88 27.09,28.732 27.09,28.477 27.538,28.03 U500.43@27.538,27.482
pads on no net: B203.1 B203.2 B203.8 B203.9 B203.10 B203.11 B203.12 B203.13 B203.14 D600.1 E300.1 E300.4 J600.A8 J600.B8 J701.MP1 J701.MP2 J702.MP1 J702.MP2 U500.5 U500.6 U500.7 U500.8 U500.11 U500.13 U500.16 U500.28 U500.44 U500.45 U500.47 U500.48 U600.1 U600.9 U600.10 U600.11 U600.12 U600.13 U600.14 U600.15 U600.17 U600.18 U600.22 U600.24

## Polygon pours and split planes (outlines as drawn)
GND on Layer 1 "GND_L02_P001" (solid, pour order 1): 0,0 0,49.999 0.002,50.002 0.004,50 69.997,50 69.997,-0.001 70.001,-0.005
3V3 on Layer 2 "3V3_L03_P002" (solid, pour order 2): 0,0 -0.001,0.001 -0.001,50.001 69.989,50.001 70.002,49.987 70.002,0
GND on Top Layer "GND_L01_P003" (solid, pour order 3): 0,0 0,49.987 70.002,49.987 70.002,0
GND on Bottom Layer "GND_L04_P004" (solid, pour order 4): 0,0 0,49.987 70.002,49.987 70.002,0

## Silkscreen, mask and mechanical layers (free items; w line width, h text height)
Top Overlay:
  text "SHUNT" at 53.28,47.041 h0.8 r90
  text "GND" at 54.407,18.449 h0.8
  text "3V3" at 54.356,14.182 h0.8
  text "P. FISCHER ; J-E. GBAYEWO ;" at 61.764,1.828 h0.6
  text "GND" at 38.294,1.168 h0.8 r90
  text "USB" at 40.885,1.168 h0.8 r90
  text "A. LANDREAU ; Y. NAIT ; M. NICOLAS" at 59.887,0.863 h0.6

## Dimensions
0,0 to 0,50 on Top Layer
0,0 to 70.002,0 on Top Layer

## Text inside footprints (layer, text, board x,y; h text height)
J600: Mechanical 13 "PCB EDGE" at 1.27,13.335 h0.6 r90